# Altium PCB PCB1.PcbDoc
Units mm, origin at the board's own origin, x right, y up, seen from the top; angles counter-clockwise.
Board outline 38.1 x 20.57 mm, 4 copper layers (Component Side, Ground Plane, Power Plane, Solder Side), stack 0.844 mm thick; 45 components, 37 nets, 194 pads, 32 vias.
Unrouted connection lines stored in the file: 5.
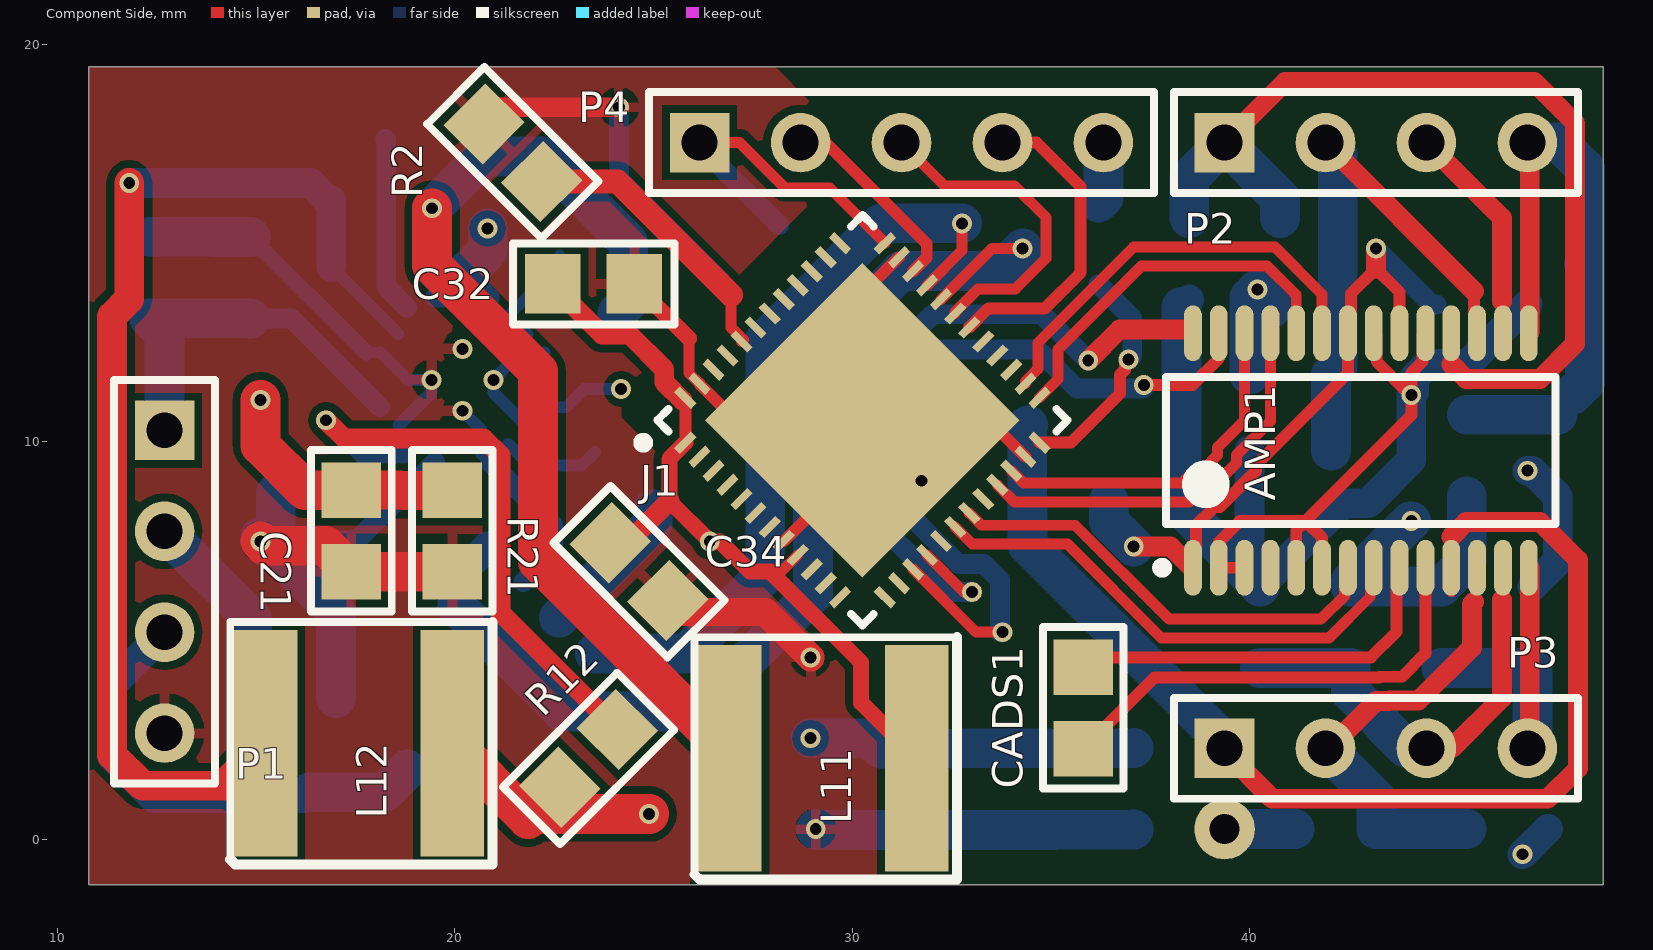
[diagram p0: Component Side view]
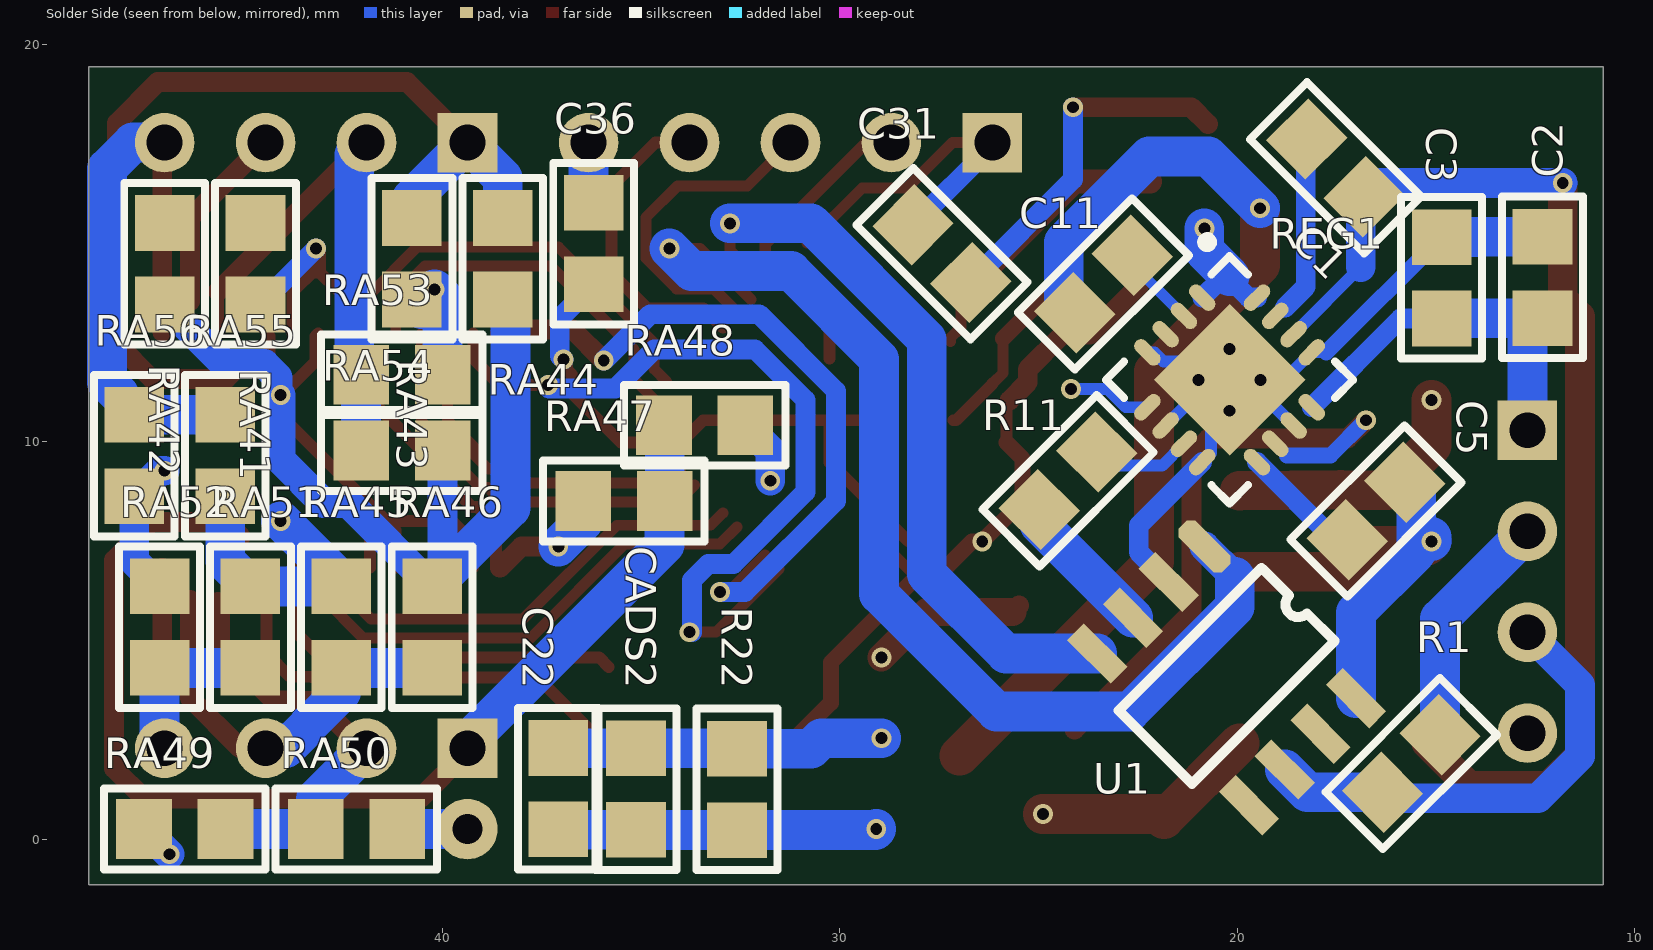
[diagram p1: Solder Side view, seen from below]
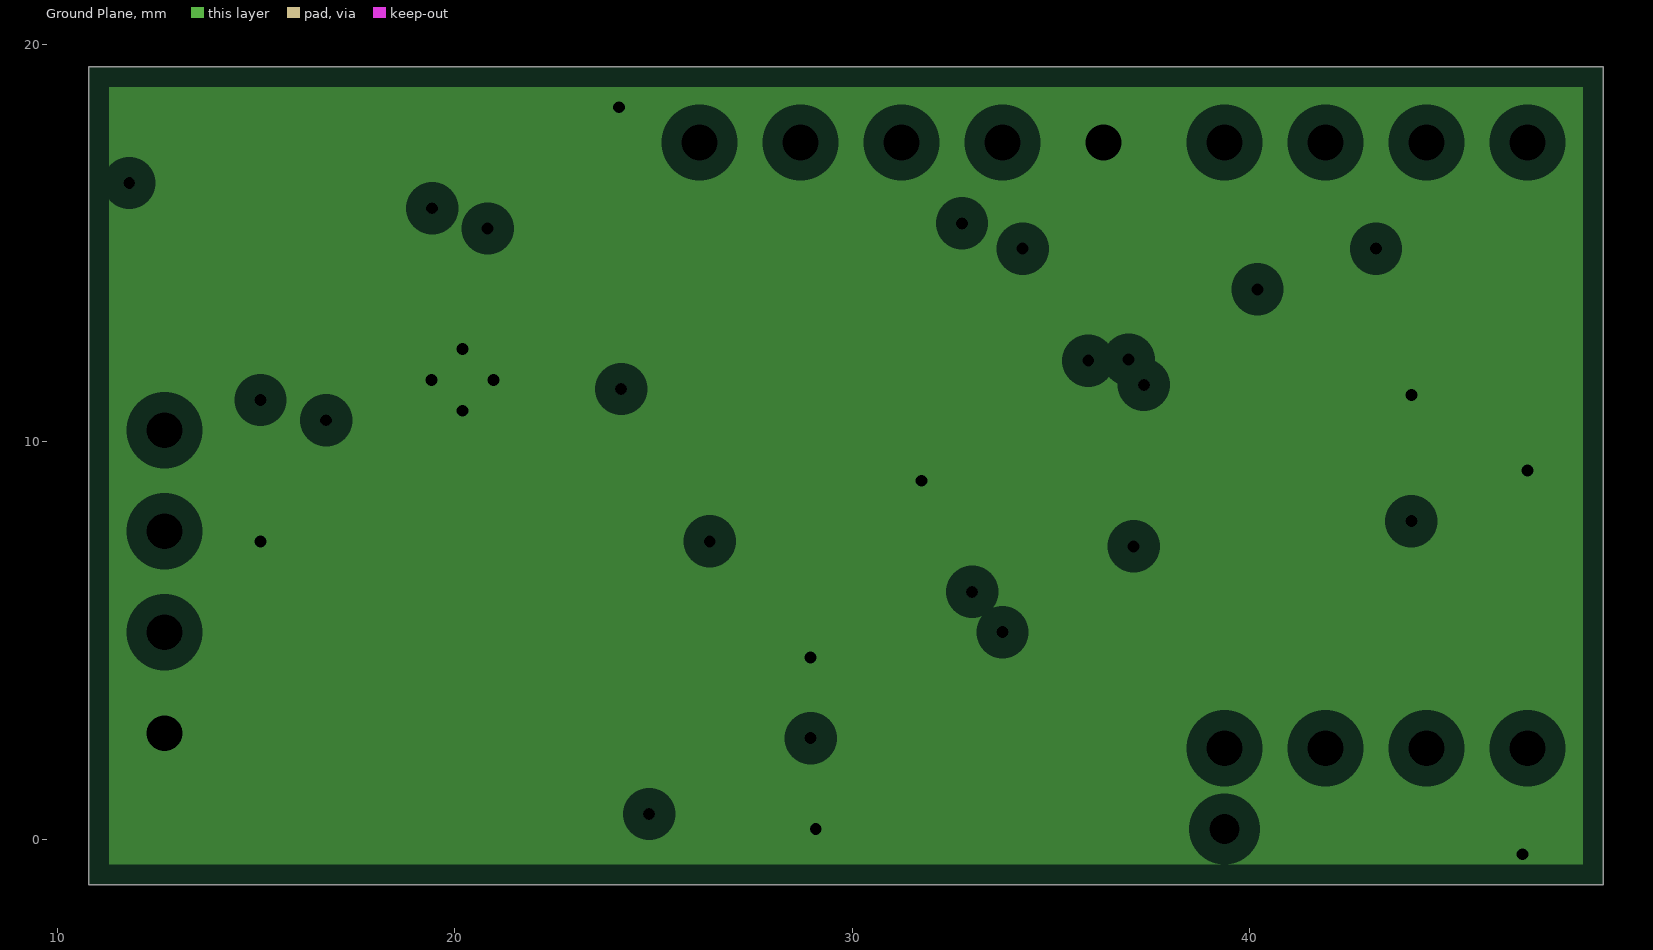
[diagram p2: Ground Plane, clearances drawn from the general rule]
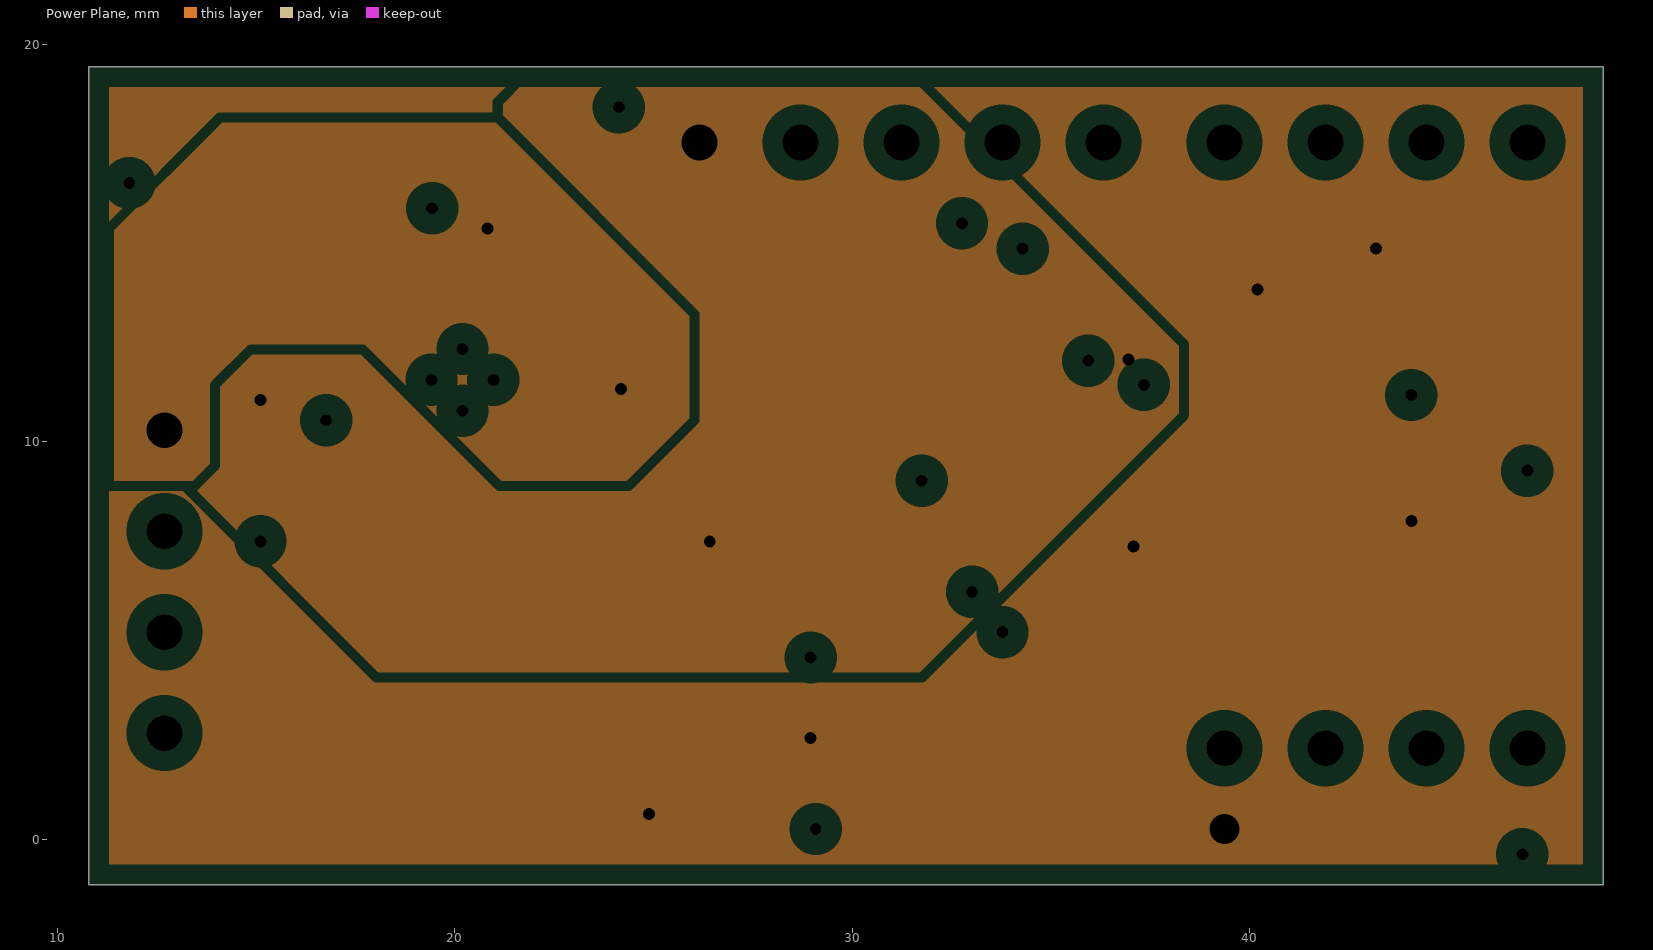
[diagram p3: Power Plane, clearances drawn from the general rule]

## Layer stack, top to bottom
Top Solder: solder mask 0.0102, Solder Resist, Dk 3.5
Component Side: signal copper 0.0356
Dielectric 1: core 0.32, FR-4, Dk 4.8
Ground Plane: plane copper 0.036, net GND
Dielectric 3: prepreg 0.127, Dk 4.2
Power Plane: plane copper 0.036, net (Multiple Nets)
Dielectric 4: core 0.254, Dk 4.2
Solder Side: signal copper 0.0356
Bottom Solder: solder mask 0.0102, Solder Resist, Dk 3.5

## Board outline
48.895,19.431 10.795,19.431 10.795,-1.143 48.895,-1.143

## Design rules (kind name [scope] priority, off if disabled: settings)
Clearance [All] p1: gap=0.2
PlaneClearance [All] p1: clearance=0.508
PlaneConnect [All] p1: planeconnectstyle=Relief reliefexpansion=0.508 reliefentries=4 reliefconductorwidth=0.254 reliefairgap=0.254
PolygonConnect [All] p1: connectstyle=Relief reliefconductorwidth=0.254 reliefentries=4 polygonreliefangle="90 Angle" airgapwidth=0.254
RoutingVias [All] p1: holewidth=0.711 width=1.27 viastyle="Through Hole" minholewidth=0.711 minwidth=1.27 maxholewidth=0.711 maxwidth=1.27
SolderMaskExpansion [All] p1: expansion=0.102
Width [All] p1: maxlimit=2 minlimit=0.275 preferedwidth=1
28 further rules are at their usual default settings.

## Components (designator, comment, footprint, x,y, rotation, side; value= is the part's Value field where it differs from the comment)
AMP1 "ADS1234" ADS1234 42.799,9.779 r90 top
C1 "Cap" R0805 17.526,16.891 r225 bottom
C2 "Cap" R0805 12.319,14.133 r90 bottom
C3 "Cap" R0805 14.859,14.124 r90 bottom
C5 "Cap" R0805 16.51,8.255 r135 bottom
C11 "Cap" R0805 23.368,13.97 r315 bottom
C21 "Cap" R0805 17.399,7.756 r90 top
C22 "Cap" R0805 37.084,1.27 r90 bottom
C31 "Cap" R0805 27.432,14.732 r45 bottom
C32 "Cap" R0805 23.495,13.97 r180 top
C34 "Cap" R0805 24.638,6.731 r135 top
C36 "Cap" R0805 36.195,14.986 r270 bottom
CADS1 "Cap" R0805 35.814,3.302 r90 top
CADS2 "Cap" R0805 35.128,1.261 r270 bottom
J1 "STM32F072CBU6" "STM32F072CBU6 - DUPLICATE" 30.258,10.541 r45 top
L11 "Inductor" Inductor 31.623,2.032 r90 top
L12 "Inductor" Inductor 19.939,2.413 r90 top
P1 "Header 4" HDR1X4 12.7,10.287 r270 top
P2 "Header 4" HDR1X4 39.37,17.526 r0 top
P3 "Header 4" HDR1X4 39.37,2.286 r0 top
P4 "Header 5" HDR1X5 26.162,17.526 r0 top
R1 "Res3" R0805 15.621,1.905 r135 bottom
R2 "Res3" R0805 21.463,17.272 r135 top
R11 "Res3" R0805 24.257,9.017 r135 bottom
R12 "Res3" R0805 23.368,2.032 r45 top
R21 "Res3" R0805 19.939,7.756 r90 top
R22 "Res3" R0805 32.588,1.252 r90 bottom
RA41 "Res3" R0805 44.704,14.478 r270 bottom
RA42 "Res3" R0805 46.99,14.478 r270 bottom
RA43 "Res3" R0805 40.767,14.605 r270 bottom
RA44 "Res3" R0805 38.481,14.605 r270 bottom
RA45 "Res3" R0805 42.545,5.334 r90 bottom
RA46 "Res3" R0805 40.259,5.334 r90 bottom
RA47 "Res3" R0805 35.433,8.509 r0 bottom
RA48 "Res3" R0805 33.401,10.414 r180 bottom
RA49 "Res3" R0805 46.482,0.254 r180 bottom
RA50 "Res3" R0805 42.164,0.254 r0 bottom
RA51 "Res3" R0805 44.831,5.334 r270 bottom
RA52 "Res3" R0805 47.117,5.334 r270 bottom
RA53 "Res3" R0805 41.021,11.684 r0 bottom
RA54 "Res3" R0805 41.021,9.779 r0 bottom
RA55 "Res3" R0805 45.466,9.652 r90 bottom
RA56 "Res3" R0805 47.752,9.652 r90 bottom
REG1 "TPS54395" TPS54395 20.193,11.557 r225 bottom
U1 "CAN TRANCEIVER" SOP8 20.828,7.366 r45 bottom

## Footprints (in the part's own frame and the unit in brackets; to place one, negate y for a bottom-side part, rotate by r counter-clockwise, add the part's x,y. Pads: shape width x height; smd on the part's side, far side on the other; paste and mask are expansions set on the pad)
ADS1234 [mm] "TSOP, 28-Leads, Body 9.70x4.40mm, Pitch 0.65mm, IPC Medium Density"
  oval 1.4x0.45 smd: 1(-2.95,4.225) 2(-2.95,3.575) 3(-2.95,2.925) 4(-2.95,2.275) 5(-2.95,1.625) 6(-2.95,0.975) 7(-2.95,0.325) 8(-2.95,-0.325) 9(-2.95,-0.975) 10(-2.95,-1.625) 11(-2.95,-2.275) 12(-2.95,-2.925) 13(-2.95,-3.575) 14(-2.95,-4.225) 15(2.95,-4.225) 16(2.95,-3.575) 17(2.95,-2.925) 18(2.95,-2.275) 19(2.95,-1.625) 20(2.95,-0.975) 21(2.95,-0.325) 22(2.95,0.325) 23(2.95,0.975) 24(2.95,1.625) 25(2.95,2.275) 26(2.95,2.925) 27(2.95,3.575) 28(2.95,4.225)
  silkscreen extent -3.07,-4.9 1.85,5.12, body extent -3.2,-4.9 3.2,4.9, height 1.2
HDR1X4 [mm] "Connector; Header; 4 Position"
  rect 1.5x1.5 hole 0.9: 1(0,0)
  round 1.5 hole 0.9: 2(2.54,0) 3(5.08,0) 4(7.62,0)
  silkscreen extent -1.27,-1.27 8.89,1.27
HDR1X5 [mm] "Connector; Header; 5 Position"
  rect 1.5x1.5 hole 0.9: 1(0,0)
  round 1.5 hole 0.9: 2(2.54,0) 3(5.08,0) 4(7.62,0) 5(10.16,0)
  silkscreen extent -1.27,-1.27 11.43,1.27
Inductor [mm]
  rect 5.7x1.6 smd: 1(0,0) 2(0,4.7)
  silkscreen extent -3.05,-1.02 3.05,5.59, body extent -2.92,0.05 2.92,4.7, height 2.8
R0805 [mm]
  rect 1.4x1.5 smd: 1(-1.025,0) 2(1.025,0)
  silkscreen extent -2.03,-1.02 2.03,1.02, body extent -1.4,-0.76 1.4,0.76, height 1
SOP8 [mm]
  oct 1.55x0.6 smd: 1(0,0)
  rect 1.55x0.6 smd: 2(0,1.27) 3(0,2.54) 4(0,3.81) 5(-5.4,3.81) 6(-5.4,2.54) 7(-5.4,1.27) 8(-5.4,0)
  silkscreen extent -4,-0.64 -1.4,4.45, body extent -4.62,-0.62 -0.62,4.38, height 1.75
"STM32F072CBU6 - DUPLICATE" [mm] "STMicroelectronics STM32F072CBU6, 32bit ARM Cortex M0 Microcontroller, 48MHz, 64 kB, 128 kB Flash, 48-Pin UFQFPN"
  rect 0.6x0.2 smd: 1(-3.55,2.75) 2(-3.55,2.25) 3(-3.55,1.75) 4(-3.55,1.25) 5(-3.55,0.75) 6(-3.55,0.25) 7(-3.55,-0.25) 8(-3.55,-0.75) 9(-3.55,-1.25) 10(-3.55,-1.75) 11(-3.55,-2.25) 12(-3.55,-2.75) 25(3.55,-2.75) 26(3.55,-2.25) 27(3.55,-1.75) 28(3.55,-1.25) 29(3.55,-0.75) 30(3.55,-0.25) 31(3.55,0.25) 32(3.55,0.75) 33(3.55,1.25) 34(3.55,1.75) 35(3.55,2.25) 36(3.55,2.75)
  rect 0.2x0.6 smd: 13(-2.75,-3.55) 14(-2.25,-3.55) 15(-1.75,-3.55) 16(-1.25,-3.55) 17(-0.75,-3.55) 18(-0.25,-3.55) 19(0.25,-3.55) 20(0.75,-3.55) 21(1.25,-3.55) 22(1.75,-3.55) 23(2.25,-3.55) 24(2.75,-3.55) 37(2.75,3.55) 38(2.25,3.55) 39(1.75,3.55) 40(1.25,3.55) 41(0.75,3.55) 42(0.25,3.55) 43(-0.25,3.55) 44(-0.75,3.55) 45(-1.25,3.55) 46(-1.75,3.55) 47(-2.25,3.55) 48(-2.75,3.55)
  rect 5.6x5.6 smd: 49(0,0)
  silkscreen extent -4.42,-3.65 3.65,3.65, body extent -3.5,-3.5 3.5,3.5, height 0.55
TPS54395 [mm] "QFN, 16-Leads, Body 4.00x4.00mm, Pitch 0.65mm, Thermal Pad 2.70x2.70mm, IPC Medium Density"
  oval 0.8x0.35 smd: 1(-1.95,0.975) 2(-1.95,0.325) 3(-1.95,-0.325) 4(-1.95,-0.975) 9(1.95,-0.975) 10(1.95,-0.325) 11(1.95,0.325) 12(1.95,0.975)
  oval 0.35x0.8 smd: 5(-0.975,-1.95) 6(-0.325,-1.95) 7(0.325,-1.95) 8(0.975,-1.95) 13(0.975,1.95) 14(0.325,1.95) 15(-0.325,1.95) 16(-0.975,1.95)
  rect 2.7x2.7 smd: 17(0,0)
  silkscreen extent -2.97,-2.2 2.2,2.2, body extent -2.13,-2.13 2.13,2.13, height 1

## Part data
C1 C2 C3 C5 C11 C21 C22 C31 C32 C34 C36 CADS1 CADS2: "Capacitor"
J1: "MICROCONTROLLER"
P1 P2 P3: "Header, 4-Pin"
P4: "Header, 5-Pin"
R1 R2 R11 R12 R21 R22 RA41 RA42 RA43 RA44 RA45 RA46 RA47 RA48 RA49 RA50 RA51 RA52 RA53 RA54 RA55 RA56: "Resistor"
REG1: "Dual Channel Buck Converter"
U1: library part 595-SN65HVD233

## Free pads (board coordinates)
  round 1.524 hole 0.762: 2(39.37,0.254)

## Via types
v1: diameter 0.5, hole 0.3, Component Side to Solder Side, 32 vias

## Nets (pads, with @x,y where several pads share a name; then routed paths per layer and width w, separated by ;. In a path a pad name is that pad's centre, name@x,y a point inside that pad or via, vN(x,y) a via of type N, cw(c..) or ccw(c..) an arc to the next point about the centre after c; other vN are vias at no path point)
3_3V: C21.2 C31.2 C32.2 C34.2 C36.2 J1.1 J1.9 J1.24 J1.36 J1.48 L11.1 P4.1 R11.1 R21.2 U1.3 | length 44.2
  Component Side w0.275: P4.1 27.164,17.526 28.307,16.383 29.436,16.383 J1.36 ; 27.94,6.731 28.215,6.731 J1.9
  Component Side w0.3: J1.1 J1.48 ; J1.24 35.502,9.975 36.738,11.211 36.738,11.679 36.865,11.806 36.865,11.973 v1(36.957,12.065)
  Component Side w0.4: J1.1 25.4,9.572 25.4,8.509 v1(26.416,7.493) 26.67,7.493 27.432,6.731 27.94,6.731 30.226,4.445 30.226,3.429 L11.1
  Component Side w0.5: C32.2 22.47,13.934 23.704,12.7 24.394,12.7 25.273,11.821 25.273,11.495 J1.48@25.732,11.036 ; C34.2@24.04,7.329 24.22,7.329 25.4,8.509
  Component Side w1: v1(15.113,11.049) 15.113,9.906 16.238,8.781 C21.2 ; C21.2@17.399,8.79 R21.2@19.939,8.763
  Solder Side w0.5: P4.1 26.162,17.452 C31.2 ; C36.2 37.048,13.108 37.048,12.156 v1(36.957,12.065)
  Solder Side w1: U1.3 24.982,7.928 R11.1
5V: AMP1.1 AMP1.20 AMP1.22 C22.2 CADS2.1 L12.1 pad.2 R12.1 R22.2 RA41.2 RA43.2 RA45.2 RA47.2 RA50.1 RA51.1 RA53.1 RA55.1 | length 43.2
  Component Side w0.3: AMP1.1 38.649,6.904 38.649,7.899 39.106,8.356 39.25,8.356 40.158,9.264 40.158,9.408 42.474,11.724 AMP1.22 42.549,12.804 42.549,13.72 43.18,14.351 43.774,13.757 AMP1.20
  Component Side w0.5: v1(37.084,7.366) 38.012,7.366 AMP1.1@38.549,6.829 ; 43.18,14.351 v1(43.18,14.859)
  Component Side w1: L12.1 21.844,0.508 21.971,0.635 v1(24.892,0.635)
  Solder Side w0.5: v1(43.18,14.859) 44.586,13.453 RA41.2
  Solder Side w1: v1(28.956,2.54) 30.462,2.54 30.725,2.277 R22.2 32.597,2.286 CADS2.1 37.075,2.286 C22.2 ; RA47.2 36.458,7.992 v1(37.084,7.366) ; pad.2 RA50.1 ; RA53.1 39.996,13.631 v1(40.199,13.834) 40.199,13.658 40.522,13.335 RA43.2 ; v1(44.069,8.001) 44.051,8.001 42.545,6.495 RA45.2 RA51.1 45.466,6.994 RA55.1
AINN1: AMP1.12 P3.2 RA49.2 RA50.2 | length 10.7
  Component Side w0.5: P3.2 41.997,2.286 43.183,3.472 43.509,3.472 43.523,3.486 44.253,3.486 45.593,4.826 45.593,5.918 45.649,5.974
  Solder Side w1: P3.2 43.189,1.007 RA50.2 RA49.2
AINN2: AMP1.17 P2.2 RA53.2 RA54.2 | length 14.3
  Component Side w0.3: 45.649,13.787 45.649,12.804 AMP1.17
  Component Side w0.5: P2.2 45.649,13.787
  Solder Side w1: P2.2 42.217,17.219 42.217,11.855 RA53.2 RA54.2
AINN3: AMP1.14 P3.4 RA51.2 RA52.2 | length 8.9
  Component Side w0.5: P3.4@47.049,2.286 AMP1.14@47.049,6.829
  Solder Side w1: RA51.2 RA52.2 47.117,2.413 P3.4
AINN4: AMP1.15 P2.4 RA55.2 RA56.2 | length 14.7
  Component Side w0.275: AMP1.15@46.99,12.763 AMP1.15
  Component Side w0.5: P2.4 47.049,17.467 AMP1.15@47.049,12.763
  Solder Side w1: RA55.2 RA56.2 ; P2.4 47.788,17.526 48.44,16.874 48.44,14.513 48.405,14.478 48.44,14.443 48.44,11.492 RA56.2@48.133,11.185
AINP1: AMP1.11 P3.1 RA47.1 RA48.1 | length 29.5
  Component Side w0.3: AMP1.11@45.074,6.248 AMP1.11
  Component Side w0.5: P3.1 39.37,2.216 40.57,1.016 47.498,1.016 48.26,1.778 48.26,7.023 47.304,7.979 45.444,7.979 45.074,7.609
  Solder Side w1: RA47.1 34.408,10.396 RA48.1 ; RA47.1@34.412,8.514 34.412,7.406 39.37,2.449 P3.1
AINP2: AMP1.18 P2.1 RA43.1 RA44.1 | length 23.8
  Component Side w0.5: P2.1 40.894,19.05 47.163,19.05 48.19,18.023 48.19,12.465 47.304,11.579 45.444,11.579 45.074,11.949
  Solder Side w1: RA44.1 38.481,16.637 P2.1 40.767,16.129 RA43.1
AINP3: AMP1.13 P3.3 RA45.1 RA46.1 | length 10.3
  Component Side w0.5: P3.3 45.085,2.286 46.349,3.55 46.349,6.024
  Solder Side w1: RA46.1 RA45.1 42.545,3.702 43.36,2.887 43.36,2.868 43.942,2.286 P3.3
AINP4: AMP1.16 P2.3 RA41.1 RA42.1 | length 4.8
  Component Side w0.5: P2.3 46.349,15.627 46.349,13.534
ASELECT0: AMP1.8 J1.18 | length 12.8
  Component Side w0.275: J1.18 33.022,7.423 35.414,7.423 37.778,5.059 41.997,5.059 43.036,6.099 43.036,6.741 AMP1.8
ASELECT1: AMP1.7 J1.19 | length 11.5
  Component Side w0.275: J1.19 33.254,7.898 35.611,7.898 37.975,5.534 41.8,5.534 42.386,6.121 42.386,6.742 AMP1.7
"CAN H": P1.2 R1.2 U1.7 | length 6
  Solder Side w1: P1.2 14.896,5.551 R1.2
"CAN L": P1.3 R1.1 U1.6 | length 11.8
  Solder Side w0.75: P1.3 11.375,3.882 11.375,2.087 12.433,1.029 16.195,1.029 R1.1
  Solder Side w1: R1.1 18.234,1.18 U1.6
"CAN RX": J1.33 U1.4 | length 19.1
  Component Side w0.275: J1.33 32.766,14.817 v1(32.766,15.494)
  Solder Side w1: U1.4 25.819,4.672 27.813,6.666 27.813,12.573 30.734,15.494 v1(32.766,15.494)
"CAN TX": J1.32 U1.1 | length 28
  Component Side w0.275: J1.32 33.515,14.859 v1(34.29,14.859)
  Solder Side w0.75: 20.066,6.604 U1.1
  Solder Side w1: 20.066,6.604 20.066,5.842 22.696,3.212 26.056,3.212 29.013,6.169 29.013,12.076 31.231,14.294 33.725,14.294 v1(34.29,14.859)
GAIN0: AMP1.23 J1.26 | length 10.8
  Component Side w0.275: J1.26 34.359,11.514 34.671,11.826 34.671,12.483 37.084,14.896 40.639,14.896 41.824,13.711 AMP1.23
GAIN1: AMP1.24 J1.25 | length 9.5
  Component Side w0.275: J1.25 35.179,11.573 35.179,12.319 37.281,14.421 40.442,14.421 41.174,13.689 AMP1.24
GND: AMP1.2 AMP1.3 AMP1.5 AMP1.6 AMP1.19 AMP1.21 C2.2 C3.2 C5.2 C21.1 C22.1 C31.1 C32.1 C34.1 C36.1 CADS2.2 J1.8 J1.23 J1.35 J1.47 J1.49 P1.4 P4.5 R2.2 R21.1 R22.1 RA42.2 RA44.2 RA46.2 RA48.2 RA49.1 RA52.1 RA54.1 RA56.1 REG1.4 REG1.6 REG1.8 REG1.11 REG1.13 REG1.17 U1.2 U1.8 | length 112.8
  Component Side w0.275: 25.89,12.6 25.89,11.727 J1.47
  Component Side w0.3: J1.47 27.076,10.541 J1.49@27.146,10.541 ; J1.8 30.258,9.48 J1.49 ; J1.49@28.702,10.541 J1.49 ; J1.49@30.258,12.097 30.258,13.723 J1.35 ; J1.23 33.44,10.541 J1.49 ; AMP1.3 AMP1.2 39.224,7.474 39.751,8.001 41.402,8.001 ; AMP1.5@41.099,6.904 AMP1.5 41.174,7.773 41.402,8.001 ; AMP1.6 41.824,7.579 41.402,8.001 ; AMP1.21 43.199,12.654 43.199,12.016 44.039,11.176 v1(44.069,11.176) ; AMP1.19 44.349,12.654 44.349,12.016 44.069,11.736 v1(44.069,11.176) ; 41.402,8.001 44.069,10.668 v1(44.069,11.176)
  Component Side w0.4: C32.1 25.89,12.6
  Component Side w0.5: R2.2 21.156,18.415 v1(24.13,18.415) ; C34.1@25.49,5.879 C34.1@25.654,5.715
  Component Side w0.7: C34.1@25.654,5.715 27.813,5.715 v1(28.956,4.572)
  Component Side w1: v1(15.113,7.493) 15.225,7.381 16.749,7.381 C21.1 R21.1
  Solder Side w0.275: 17.762,12.246 REG1.13
  Solder Side w0.3: REG1.13 18.814,11.557 v1(19.415,11.557) 19.415,11.239 REG1.11 ; v1(20.193,10.779) 20.658,10.314 20.658,9.713 REG1.8 ; REG1.6 20.971,11.239 v1(20.971,11.557) 21.436,12.022 21.86,12.022 22.085,12.246 REG1.4
  Solder Side w0.4: C3.2 17.762,12.246
  Solder Side w0.5: REG1.8 22.479,7.892 22.479,7.221 U1.2 ; v1(24.13,18.415) 24.13,16.602 26.707,14.025 C31.1
  Solder Side w0.75: v1(31.75,9.017) 31.75,9.788 RA48.2 ; RA44.2@38.288,13.387 RA44.2 ; RA46.2@39.996,6.622 RA54.1 ; RA46.2 42.354,8.454 42.984,8.454 44.069,9.539 v1(44.069,11.176) 44.141,11.248 44.141,11.615 44.478,11.952 45.489,11.952 RA42.2 ; v1(46.863,-0.381) 46.872,-0.381 RA49.1 ; v1(46.99,9.271) 47.108,9.271 RA56.1 47.752,6.994 RA52.1
  Solder Side w1: C2.2 13.936,15.158 13.945,15.149 C3.2 ; v1(15.113,7.493) v1@15.113,7.601 ; C5.2 15.494,8.689 15.494,7.22 17.01,5.705 U1.8 ; v1(29.083,0.254) 29.11,0.227 R22.1 35.103,0.227 35.103,0.236 CADS2.2 37.075,0.236 C22.1 ; C36.1 36.322,16.138 P4.5 ; RA44.2@38.288,13.387 38.288,8.33 39.996,6.622 RA46.2
  other v1: 20.193,12.335
NetAMP1_9: AMP1.9 CADS1.2 | length 9.9
  Component Side w0.3: CADS1.2 36.059,4.572 43.053,4.572 43.699,5.218 43.699,6.754 AMP1.9
NetAMP1_10: AMP1.10 CADS1.1 | length 11.8
  Component Side w0.3: CADS1.1 37.609,4.072 43.26,4.072 43.274,4.086 43.837,4.086 44.424,4.673 AMP1.10
NetC1_1: C1.1 REG1.15 | length 4.5
  Solder Side w0.5: C1.1 18.277,17.59 18.277,13.898 REG1.15@18.804,13.371
NetC1_2: C1.2 L12.2 REG1.14 | length 28.5
  Component Side w0.75: v1(11.811,16.51) 11.811,13.589 11.375,13.153 11.375,2.118 12.151,1.342 14.168,1.342 L12.2
  Solder Side w0.3: 16.891,14.399 REG1.14
  Solder Side w0.75: v1(11.811,16.51) 16.368,16.51 16.801,16.076 16.891,16.076 16.891,14.399
NetC5_1: C5.1 REG1.9 | length 3.1
  Solder Side w0.5: C5.1 17.545,7.53 REG1.9
NetC11_1: C11.1 REG1.2 | length 2.1
  Solder Side w0.275: REG1.2 22.643,14.467 C11.1
NetC11_2: C11.2 L11.2 REG1.3 | length 25.2
  Component Side w1: v1(19.431,15.875) 19.431,14.44 22.098,11.773 22.098,6.984 L11.2@26.986,2.095
  Solder Side w0.3: REG1.3 REG1.3@21.837,12.706
  Solder Side w1: v1(19.431,15.875) 20.732,17.176 22.213,17.176 24.369,15.02 24.369,13.521 C11.2
NetJ1_44: J1.44 R2.1 | length 7.3
  Component Side w0.275: 26.95,13.69 26.95,12.876 27.261,12.565 J1.44
  Component Side w0.6: R2.1 24.1,16.547 26.95,13.697 26.95,13.69
NetR11_2: R11.2 REG1.7 | length 2.6
  Solder Side w0.3: REG1.7 21.892,9.398 23.188,9.398 R11.2
NetR12_2: R12.2 REG1.10 | length 15.6
  Component Side w0.5: v1(16.764,10.541) 17.226,10.079 20.727,10.079 21.148,9.658 21.148,5.702 R12.2
  Solder Side w0.3: 18.748,9.652 REG1.10
  Solder Side w0.4: v1(16.764,10.541) 17.653,9.652 18.748,9.652
NRST: J1.34 P4.2 | length 5.1
  Component Side w0.3: P4.2 29.337,17.526 31.877,14.986 31.877,14.635 J1.34
PWDN: AMP1.26 J1.22 | length 9
  Component Side w0.275: J1.22 34.315,8.959 38.296,8.959 38.656,9.319 38.851,9.319 39.195,9.663 39.195,9.858 39.874,10.537 AMP1.26
SCLK: AMP1.27 J1.15 | length 20.6
  Component Side w0.275: J1.15 33.117,5.207 v1(33.782,5.207)
  Component Side w0.3: v1@37.338,11.385 v1(37.338,11.43) 38.563,11.43 39.224,12.091 AMP1.27
  Solder Side w0.5: v1@33.72,5.207 33.72,6.513 33.31,6.923 32.677,6.923 30.861,8.739 30.861,11.049 32.131,12.319 34.671,12.319 35.651,11.339 37.321,11.339 37.338,11.356 v1(37.338,11.43)
SOMI: AMP1.28 J1.16 | length 18.3
  Component Side w0.275: J1.16 32.808,6.223 v1(33.02,6.223)
  Component Side w0.5: v1(35.941,12.039) 36.729,12.827 38.451,12.827 AMP1.28@38.549,12.729
  Solder Side w0.5: v1(33.02,6.223) 32.387,6.223 30.099,8.511 30.099,11.277 32.03,13.208 34.772,13.208 v1(35.941,12.039)
SPEED: AMP1.25 J1.21 | length 10.2
  Component Side w0.275: J1.21 34.083,8.484 38.493,8.484 38.852,8.844 39.048,8.844 39.67,9.466 39.67,9.662 40.524,10.515 AMP1.25
SWCLK: J1.30 P4.4 | length 8
  Component Side w0.3: J1.30 33.426,13.356 34.851,13.356 35.75,14.254 35.75,16.416 34.64,17.526 P4.4
SWDIO: J1.31 P4.3 | length 8.3
  Component Side w0.275: P4.3 32.33,16.438 34.086,16.438 34.877,15.647 34.877,14.616 34.105,13.843 33.171,13.843 32.591,13.263 J1.31
"V BATT": C2.1 C3.1 P1.1 REG1.1 REG1.5 REG1.12 REG1.16 | length 15.1
  Solder Side w0.3: REG1.5 22.806,10.868 23.266,11.328 v1(24.188,11.328)
  Solder Side w0.5: C3.1 15.893,13.099 REG1.12 ; REG1.16 19.716,13.625 20.187,14.097 20.411,14.097 REG1.1
  Solder Side w1: P1.1 12.7,12.727 C2.1 14.859,13.108 C3.1 ; 20.187,14.166 20.828,14.807 v1(20.828,15.367)
pads on no net: AMP1.4 J1.2 J1.3 J1.4 J1.5 J1.6 J1.7 J1.10 J1.11 J1.12 J1.13 J1.14 J1.17 J1.20 J1.27 J1.28 J1.29 J1.37 J1.38 J1.39 J1.40 J1.41 J1.42 J1.43 J1.45 J1.46 U1.5

## Polygon pours and split planes (outlines as drawn)
GND on Component Side "Top Layer-No Net" (solid, pour order 6): 10.795,19.431 26.67,19.431 28.067,19.431 30.226,17.272 24.282,11.328 24.188,11.328 24.188,10.61 33.401,1.397 30.861,-1.143 10.795,-1.143
GND on Ground Plane (split plane): 48.385,-0.633 11.305,-0.633 11.305,18.921 48.385,18.921
"V BATT" on Power Plane (split plane): 25.906,13.154 25.906,10.595 24.33,9.019 21.167,9.019 17.776,12.411 17.734,12.439 17.685,12.448 14.859,12.448 14.809,12.439 14.767,12.411 13.878,11.522 13.85,11.48 13.841,11.43 13.841,9.452 13.408,9.019 11.432,9.019 11.432,15.313 14.151,18.032 21.028,18.032
3_3V on Power Plane (split plane): 38.225,12.392 38.225,10.722 31.696,4.193 18.088,4.193 13.511,8.77 13.512,8.77 13.554,8.798 14.062,9.306 14.09,9.348 14.099,9.398 14.099,11.376 14.913,12.19 17.631,12.19 21.022,8.798 21.064,8.77 21.114,8.761 24.384,8.761 24.434,8.77 24.476,8.798 26.127,10.449 26.155,10.491 26.164,10.541 26.164,13.208 26.155,13.258 26.127,13.3 21.195,18.231 21.202,18.241 21.211,18.29 21.211,18.488 21.644,18.921 31.696,18.921
5V on Power Plane (split plane): 20.99,18.634 20.962,18.592 20.953,18.542 20.953,18.29 14.097,18.29 14.047,18.281 14.005,18.253 11.305,15.553 11.305,18.921 21.277,18.921
5V on Power Plane (split plane): 48.385,-0.633 11.305,-0.633 11.305,8.761 13.154,8.761 17.942,3.972 17.984,3.944 18.034,3.935 31.75,3.935 31.8,3.944 31.842,3.972 38.446,10.576 38.474,10.618 38.483,10.668 38.483,12.446 38.474,12.496 38.446,12.538 32.063,18.921 48.385,18.921

## Other copper
Power Plane (plane layer: these items are gaps in the copper):
  lines w0.254: 13.208,8.89 18.034,4.064 31.75,4.064 38.354,10.668 38.354,12.446 31.623,19.177 21.717,19.177 21.082,18.542 21.082,18.29 ; 11.303,8.89 13.462,8.89 13.97,9.398 13.97,11.43 14.859,12.319 15.875,12.319 17.685,12.319 21.114,8.89 24.384,8.89 26.035,10.541 26.035,13.208 21.082,18.161 14.097,18.161 11.303,15.367 11.303,8.89